# Altium PCB PONG_3.PcbDoc
Units mm, origin at the board's own origin, x right, y up, seen from the top; angles counter-clockwise.
Board outline 310 x 220 mm, 2 copper layers (Top Layer, Bottom Layer); 105 components, 225 nets, 1000 pads, 0 vias.
Unrouted connection lines stored in the file: 557.
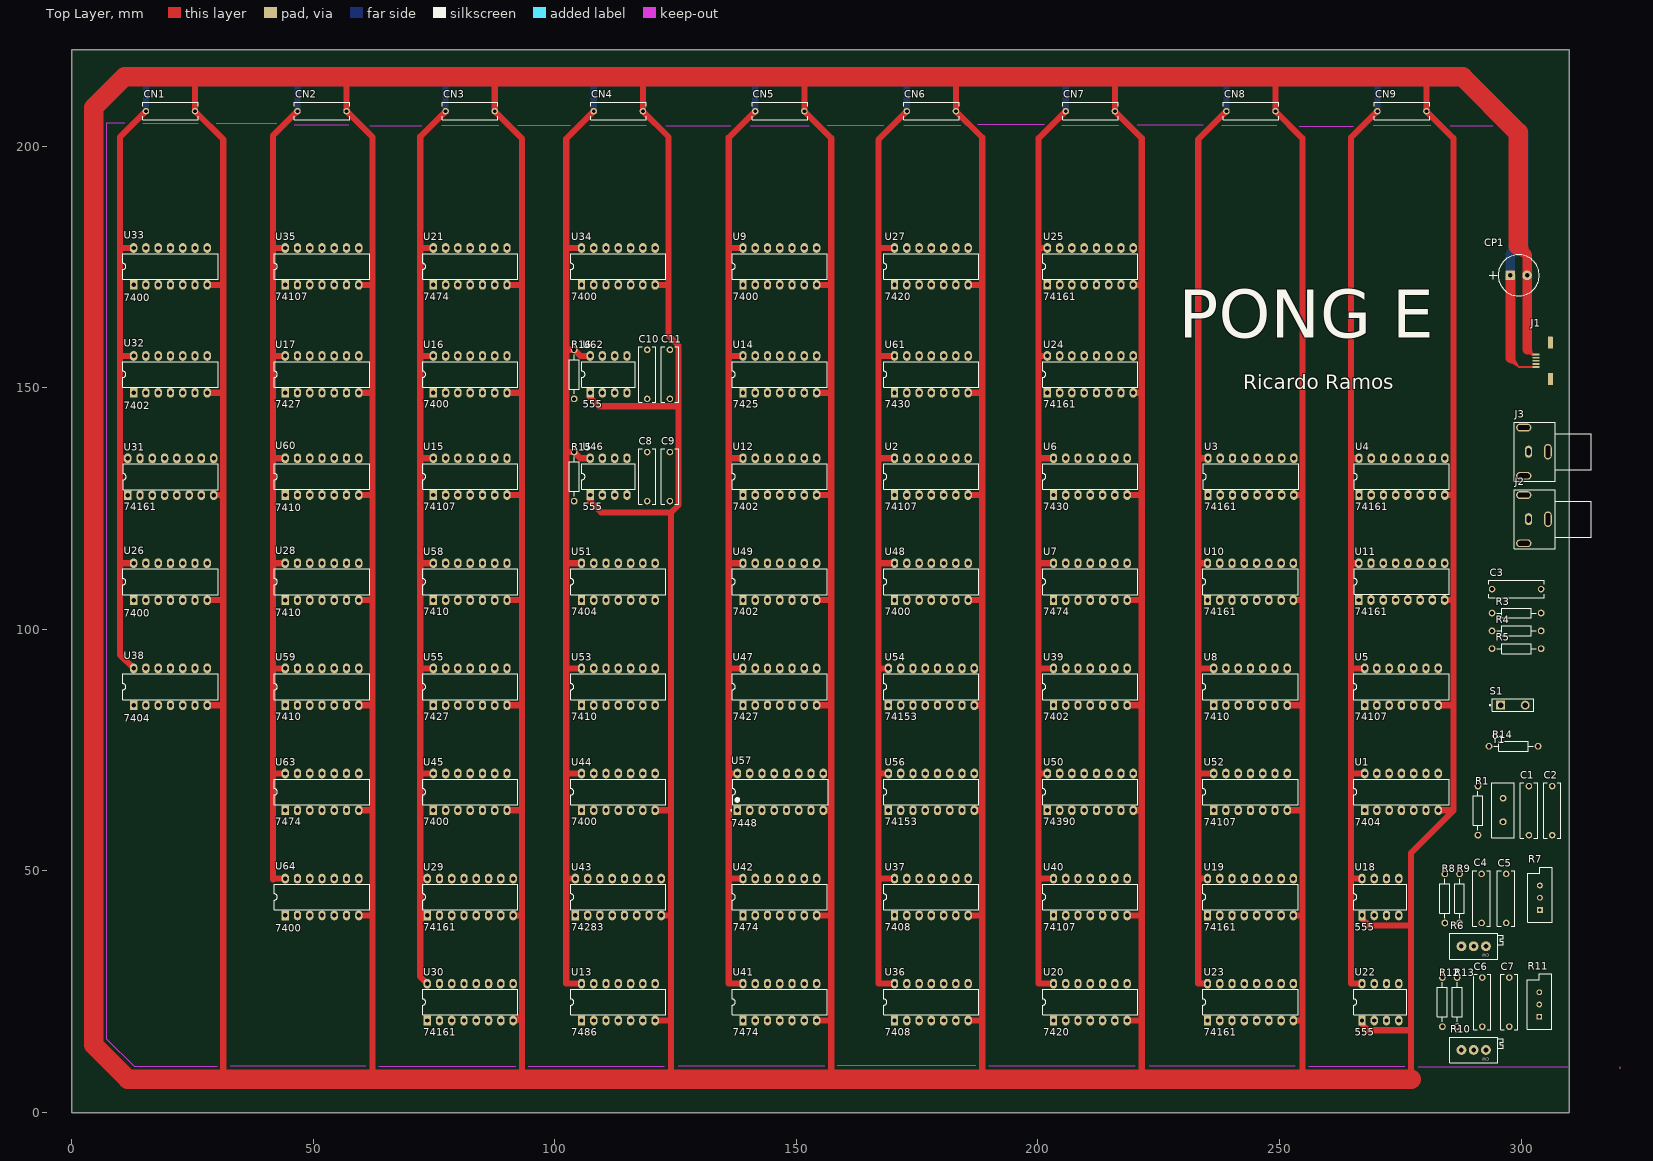
[diagram p0: Top Layer view]
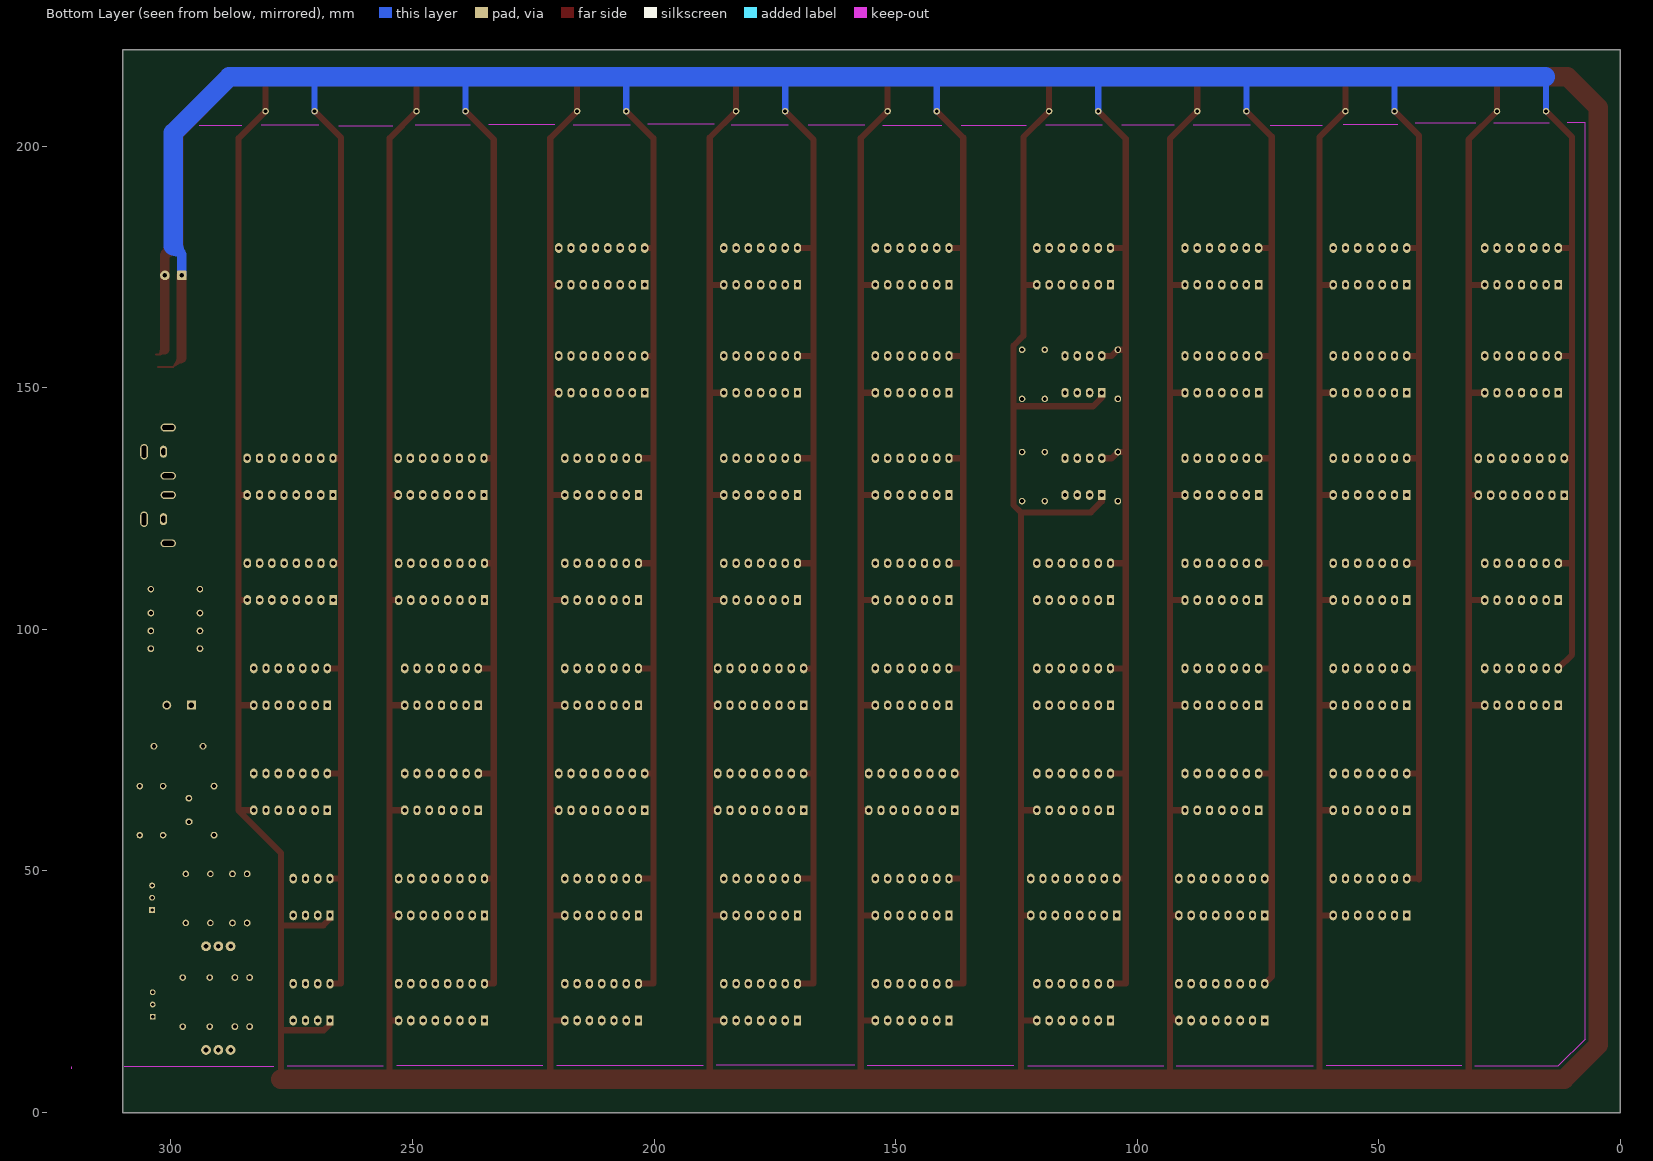
[diagram p1: Bottom Layer view, seen from below]

## Layer stack, top to bottom
Top Solder: solder mask 0.0102, Solder Resist, Dk 3.5
Top Layer: signal copper 0.0356
Dielectric 1: dielectric 0.32, FR-4, Dk 4.8
Bottom Layer: signal copper 0.0356
Bottom Solder: solder mask 0.0102, Solder Resist, Dk 3.5

## Board outline
0,0 310,0 310,220 0,220

## Design rules (kind name [scope] priority, off if disabled: settings)
Clearance [All] p1: gap=0.18 except(0.23: Track-THPad; 0.5: Track-Track)
PolygonConnect [All] p1: connectstyle=Relief reliefconductorwidth=0.254 reliefentries=4 polygonreliefangle="90 Angle" airgapwidth=0.254
RoutingVias [All] p1: holewidth=0.5 width=1 viastyle="Through Hole" minholewidth=0.5 minwidth=1 maxholewidth=0.5 maxwidth=1
SolderMaskExpansion [All] p1: expansion=0.102
Width Width_Power [InNet('VCC') or InNet('GND')] p1: maxlimit=4 minlimit=0.4 preferedwidth=0.4
Width [All] p2: maxlimit=0.4 minlimit=0.4 preferedwidth=0.4
30 further rules are at their usual default settings.

## Classes and differential pairs
component class CLK: C1 C2 R1 U1 U2 Y1
component class GameControl: C8 C9 R14 R15 S1 U44 U45 U46 U47 U48
component class HorizBallControl: U31 U32 U33 U34 U35
component class HorizBallCounter: U24 U25 U26 U27 U28
component class HSYNC: U3 U4 U5 U6 U7 U8 U9
component class Net: U15 U16 U17
component class Paddle_1: C4 C5 R6 R7 R8 R9 U18 U19 U20
component class Paddle_2: C6 C7 R10 R11 R12 R13 U21 U22 U23
component class POWER: CN1 CN2 CN3 CN4 CN5 CN6 CN7 CN8 CN9 CP1 J1
component class ScoreCount: U49 U50 U51 U52 U53
component class ScoreDisplay_1: U54 U55 U56 U57
component class ScoreDisplay_2: U58 U59 U60 U61
component class Sound: C10 C11 J3 R16 U62 U63 U64
component class SYNC-VideoSum: C3 J2 R3 R4 R5 U13 U14
component class VertBallControl: U36 U37 U38 U39 U40 U41 U42 U43
component class VertBallCounter: U29 U30
component class VSYNC: U10 U11 U12

## Components (designator, comment, footprint, x,y, rotation, side; value= is the part's Value field where it differs from the comment)
C1 "Cap" CAPR10.16-11.5x3.6 301.624,62.489 r270 top
C2 "Cap" CAPR10.16-11.5x3.6 306.45,62.489 r270 top
C3 "Cap" CAPR10.16-11.5x3.6 299.084,108.336 r180 top
C4 "Cap" CAPR10.16-11.5x3.6 291.845,44.328 r90 top
C5 "Cap" CAPR10.16-11.5x3.6 296.925,44.328 r90 top
C6 "Cap" CAPR10.16-11.5x3.6 291.972,22.865 r90 top
C7 "Cap" CAPR10.16-11.5x3.6 297.56,22.865 r270 top
C8 "Cap" CAPR10.16-11.5x3.6 119.125,131.631 r90 top
C9 "Cap" CAPR10.16-11.5x3.6 123.824,131.631 r90 top
C10 "Cap" CAPR10.16-11.5x3.6 119.125,152.807 r90 top
C11 "Cap" CAPR10.16-11.5x3.6 123.824,152.807 r90 top
CN1 "Cap" CAPR10.16-11.5x3.6 20.446,207.269 r180 top
CN2 "Cap" CAPR10.16-11.5x3.6 51.815,207.269 r180 top
CN3 "Cap" CAPR10.16-11.5x3.6 82.481,207.269 r180 top
CN4 "Cap" CAPR10.16-11.5x3.6 113.147,207.269 r180 top
CN5 "Cap" CAPR10.16-11.5x3.6 146.568,207.269 r180 top
CN6 "Cap" CAPR10.16-11.5x3.6 177.942,207.269 r180 top
CN7 "Cap" CAPR10.16-11.5x3.6 210.84,207.269 r180 top
CN8 "Cap" CAPR10.16-11.5x3.6 244.093,207.269 r180 top
CN9 "Cap" CAPR10.16-11.5x3.6 275.335,207.269 r180 top
CP1 "Cap" CAPE3.5mm 299.5,173.3 r0 top
J1 "USB Micro Type B (recommended if hand soldering)" "USB Micro B SMD" 308.7,155.6 r90 top
J2 "Video OUT" "RCA 2" 305.561,122.821 r180 top
J3 "Audio OUT" "RCA 2" 305.561,136.784 r180 top
R1 "Res1" AXIAL-0.4 291.083,62.489 r270 top
R3 "Res1" AXIAL-0.4 299.084,103.383 r0 top
R4 "Res1" AXIAL-0.4 299.084,99.7 r0 top
R5 "Res1" AXIAL-0.4 299.084,96.017 r0 top
R6 "RPot" TRIMPOT_THT_PV36X 290.194,34.422 r180 top
R7 "RPot" VR5 303.91,44.455 r90 top
R8 "Res1" AXIAL-0.4 284.225,44.328 r270 top
R9 "Res1" AXIAL-0.4 287.273,44.328 r270 top
R10 "RPot" TRIMPOT_THT_PV36X 290.194,12.959 r180 top
R11 "RPot" VR5 303.783,22.357 r90 top
R12 "Res1" AXIAL-0.4 283.717,22.865 r270 top
R13 "Res1" AXIAL-0.4 286.765,22.865 r270 top
R14 "Res1" AXIAL-0.4 298.449,75.824 r180 top
R15 "Res1" AXIAL-0.4 104.012,131.631 r90 top
R16 "Res1" AXIAL-0.4 104.012,152.807 r90 top
S1 "COIN SW" SPST-2 298.322,84.333 r0 top
U1 "7404" N014 275.24,66.372 r0 top
U2 "74107" N014D 177.942,131.631 r0 top
U3 "74161" N016 244.093,131.631 r0 top
U4 "74161" N016 275.335,131.631 r0 top
U5 "74107" N014 275.24,88.125 r0 top
U6 "7430" N014 210.84,131.631 r0 top
U7 "7474" N014D 210.84,109.878 r0 top
U8 "7410" N014 243.993,88.125 r0 top
U9 "7400" N014 146.568,175.138 r0 top
U10 "74161" N016 243.993,109.878 r0 top
U11 "74161" N016 275.3,109.9 r0 top
U12 "7402" N014 146.568,131.631 r0 top
U13 "7486" N014 113.147,22.865 r0 top
U14 "7425" N014 146.568,152.807 r0 top
U15 "74107" N014 82.481,131.631 r0 top
U16 "7400" N014 82.481,152.807 r0 top
U17 "7427" N014 51.815,152.807 r0 top
U18 "555" P008 270.89,44.618 r0 top
U19 "74161" N016 243.993,44.618 r0 top
U20 "7420" N014 210.84,22.865 r0 top
U21 "7474" N014D 82.481,175.138 r0 top
U22 "555" P008 270.89,22.865 r0 top
U23 "74161" N016 243.993,22.865 r0 top
U24 "74161" N016 210.84,152.807 r0 top
U25 "74161" N016 210.84,175.138 r0 top
U26 "7400" N014 20.446,109.878 r0 top
U27 "7420" N014 177.942,175.138 r0 top
U28 "7410" N014 51.815,109.878 r0 top
U29 "74161" N016 82.481,44.618 r0 top
U30 "74161" N016 82.481,22.865 r0 top
U31 "74161" N016 20.5,131.6 r0 top
U32 "7402" N014 20.446,152.807 r0 top
U33 "7400" N014 20.446,175.138 r0 top
U34 "7400" N014 113.147,175.138 r0 top
U35 "74107" N014 51.815,175.138 r0 top
U36 "7408" N014 177.942,22.865 r0 top
U37 "7408" N014 177.942,44.618 r0 top
U38 "7404" N014 20.446,88.125 r0 top
U39 "7402" N014 210.84,88.125 r0 top
U40 "74107" N014 210.84,44.618 r0 top
U41 "7474" N014D 146.568,22.865 r0 top
U42 "7474" N014D 146.568,44.618 r0 top
U43 "74283" N016D#1 113.147,44.618 r0 top
U44 "7400" N014 113.147,66.372 r0 top
U45 "7400" N014 82.481,66.372 r0 top
U46 "555" P008 111.124,131.631 r0 top
U47 "7427" N014 146.568,88.125 r0 top
U48 "7400" N014 177.942,109.878 r0 top
U49 "7402" N014 146.568,109.878 r0 top
U50 "74390" N016 210.84,66.372 r0 top
U51 "7404" N014 113.147,109.878 r0 top
U52 "74107" N014 243.993,66.372 r0 top
U53 "7410" N014 113.147,88.125 r0 top
U54 "74153" N016 177.942,88.125 r0 top
U55 "7427" N014 82.481,88.125 r0 top
U56 "74153" N016 177.942,66.372 r0 top
U57 "7448" N016D#2 146.684,66.372 r90 top
U58 "7410" N014 82.481,109.878 r0 top
U59 "7410" N014 51.815,88.125 r0 top
U60 "7410" N014 51.815,131.631 r0 top
U61 "7430" N014 177.942,152.807 r0 top
U62 "555" P008 111.124,152.807 r0 top
U63 "7474" N014D 51.815,66.372 r0 top
U64 "7400" N014 51.815,44.618 r0 top
Y1 "14.318 Mhz" HC-49U 296.29,62.616 r90 top

## Footprints (in the part's own frame and the unit in brackets; to place one, negate y for a bottom-side part, rotate by r counter-clockwise, add the part's x,y. Pads: shape width x height; smd on the part's side, far side on the other; paste and mask are expansions set on the pad)
AXIAL-0.4 [mm] "Axial Device, Thru-Hole; 2 Leads; 0.4 in Pin Spacing"
  round 1.4 hole 0.85: 1(-5.08,0) 2(5.08,0)
  silkscreen extent -4.06,-1.02 4.06,1.02
CAPE3.5mm [mm]
  round 0.508 on Mech15: 0(0,0)
  rrect25% 2x2 hole 0.9: 1(-1.75,0)
  round 2 hole 0.9: 2(1.75,0)
  silkscreen extent -6.05,-4.25 4.25,4.25, body extent -4.25,-4.25 4.22,4.23, height 7.1
CAPR10.16-11.5x3.6 [mm] "Capacitor, Ceramic, Thru-Hole, Dipped Radial; Body 11.5 x 3.6 mm (WxT) Pin Spacing 10.16 mm (typ)"
  round 1.35 hole 0.8: 1(-5.08,0) 2(5.08,0)
  silkscreen extent -5.75,-1.8 5.75,1.8
HC-49U [mm] "Quartz Crystal, Thru-Hole; 2 Leads; Body 11.35 x 4.65 x 13.46 mm (LxWxH max)"
  oct 1.4x1.4 hole 0.8: 1(-2.44,0)
  round 1.4 hole 0.8: 2(2.44,0)
  silkscreen extent -5.7,-2.35 5.7,2.35
N014 [mil] "DIP; 14 Leads; Row Spacing 7.62 mm; Pitch 2.54 mm"
  rect 60x80 hole 35.43: 1(-300,-150)
  oval 60x80 hole 35.43: 2(-200,-150) 3(-100,-150) 4(0,-150) 5(100,-150) 6(200,-150) 7(300,-150) 8(300,150) 9(200,150) 10(100,150) 11(0,150) 12(-100,150) 13(-200,150) 14(-300,150)
  silkscreen extent -388,-104 388,104
N014D [mil] "DIP; 14 Leads; Row Spacing 7.62 mm; Pitch 2.54 mm"
  rect 60x80 hole 35.43: 1(-300,-150)
  oval 60x80 hole 35.43: 2(-200,-150) 3(-100,-150) 4(0,-150) 5(100,-150) 6(200,-150) 7(300,-150) 8(300,150) 9(200,150) 10(100,150) 11(0,150) 12(-100,150) 13(-200,150) 14(-300,150)
  silkscreen extent -388,-104 388,104
N016 [mil] "DIP; 16 Leads; Row Spacing 7.62 mm; Pitch 2.54 mm"
  rect 60x80 hole 35.43: 1(-350,-150)
  oval 60x80 hole 35.43: 2(-250,-150) 3(-150,-150) 4(-50,-150) 5(50,-150) 6(150,-150) 7(250,-150) 8(350,-150) 9(350,150) 10(250,150) 11(150,150) 12(50,150) 13(-50,150) 14(-150,150) 15(-250,150) 16(-350,150)
  silkscreen extent -388,-104 388,104
N016D#1 [mil] "DIP; 16 Leads; Row Spacing 7.62 mm; Pitch 2.54 mm"
  rect 60x80 hole 35.43: 1(-350,-150)
  oval 60x80 hole 35.43: 2(-250,-150) 3(-150,-150) 4(-50,-150) 5(50,-150) 6(150,-150) 7(250,-150) 8(350,-150) 9(350,150) 10(250,150) 11(150,150) 12(50,150) 13(-50,150) 14(-150,150) 15(-250,150) 16(-350,150)
  silkscreen extent -388,-104 388,104
N016D#2 [mil] "DIP, 16-Leads, Row Spacing 7.62mm, Pitch 2.54mm, Body 19.31x6.35mm"
  rect 80x60 hole 35.43: 1(-150,350)
  oval 80x60 hole 35.43: 2(-150,250) 3(-150,150) 4(-150,50) 5(-150,-50) 6(-150,-150) 7(-150,-250) 8(-150,-350) 9(150,-350) 10(150,-250) 11(150,-150) 12(150,-50) 13(150,50) 14(150,150) 15(150,250) 16(150,350)
  silkscreen extent -155,-390 104,406, body extent -130,-390 130,390, height 200
P008 [mil] "DIP; 8 Leads; Row Spacing 7.62 mm; Pitch 2.54 mm"
  rect 60x80 hole 35.43: 1(-150,-150)
  oval 60x80 hole 35.43: 2(-50,-150) 3(50,-150) 4(150,-150) 5(150,150) 6(50,150) 7(-50,150) 8(-150,150)
  silkscreen extent -217,-104 217,104
"RCA 2" [mm] "3.5mm Audio Jack, 3 pin"
  oval 1.6x3.2 hole 1 slot 2.5 at 90 deg: 1(0,0)
  oval 3.2x1.6 hole 1 slot 2.5 at 0 deg: 1(5,5) 1(5,-5)
  oval 1.5x2.5 hole 0.8 slot 1.4 at 90 deg: 2(4,0)
  silkscreen extent -9,-6.13 7,6.12
SPST-2 [mm] "Switch; 2 Leads"
  rect 1.85x1.85 hole 1.1: 1(-2.54,0)
  round 1.85 hole 1.1: 2(2.54,0)
  silkscreen extent -4.89,-1.27 4.28,1.27
TRIMPOT_THT_PV36X [mil] "TRIMMER, MURATA, PV36X"
  round 80 hole 38: CCW(100,0) CW(-100,0) W(0,0)
  silkscreen extent -240,-104 195,104, body extent -240,-98 189,98, height 394
"USB Micro B SMD" [mm]
  rrect20% 0.35x1.5 smd: 1(-1.3,5.6) 2(-0.65,5.6) 3(0,5.6) 4(0.65,5.6) 5(1.3,5.6)
  rrect20% 2.5x1 smd: SH(-3.75,2.625) SH(3.75,2.625)
VR5 [mm] "Thru-Hole; 3 Leads"
  rect 1.2x1.2 hole 0.7: 1(-2.54,0)
  round 1.2 hole 0.7: 2(0,0) 3(2.54,0)
  silkscreen extent -5.08,-2.54 6.35,2.54

## Part data
C1 C2 C3 C4 C5 C6 C7 C8 C9 C10 C11 CN1 CN2 CN3 CN4 CN5 CN6 CN7 CN8 CN9 CP1: "Capacitor"
J1: library part USB_Micro_TypeB_FCI, "Connector SMD-THD USB Micro Type B middle mount"
J2 J3: library part "Phonejack2 TN", "Jack Socket, 1/4\" [6.5mm], Thru-Hole, Vertical, 2-Conductor with Tip closed"
R1 R3 R4 R5 R8 R9 R12 R13 R14 R15 R16: "Resistor"
R6 R7 R10 R11: "Potentiometer"
S1: library part SW-PB, "Switch"
U1 U38 U51: library part SN74LS04N, "Hex Inverter"
U2: library part SN74HC107N, "Dual J-K Negative-Edge-Triggered Flip-Flop with Clear"
U3 U4 U10 U11 U19 U23 U24 U25 U29 U30 U31: library part SN74LS161AN, "Synchronous 4-Bit Counter"
U5 U15 U35 U40 U52: library part SN74LS107AN, "Dual J-K Flip-Flop with Clear"
U6 U61: library part SN74LS30N, "8-Input Positive-NAND Gate"
U7 U21 U41 U42 U63: library part SN74LS74AN, "Dual D-Type Positive-Edge-Triggered Flip-Flop with Preset and Clear"
U8 U28 U53 U58 U59 U60: library part SN74LS10N, "Triple 3-Input Positive-NAND Gate"
U9 U16 U26 U33 U34 U44 U45 U48 U64: library part SN74LS00N, "Quadruple 2-Input Positive-NAND Gate"
U12 U32 U39 U49: library part SN74LS02N, "Quadruple 2-Input Positive-NOR Gate"
U13: library part SN74LS86AN, "Quadruple 2-Input Exclusive-OR Gate"
U14: library part SN7425N, "Dual 4-Input NOR Gate with Strobe"
U17 U47 U55: library part SN74LS27N, "Triple 3-Input Positive-NOR Gate"
U18 U22 U46 U62: library part NE555P, "Precision Timer"
U20 U27: library part SN74LS20N, "Dual 4-Input Positive-NAND Gate"
U36 U37: library part SN74LS08N, "Quadruple 2-Input Positive-AND Gate"
U43: library part SN54S283FK, "4-Bit Binary Full Adder with Fast Carry"
U50: library part SN74LS390N, "Dual 4-Bit Decade and Binary Counter"
U54 U56: library part SN74LS153N, "Dual 4-Line to 1-Line Data Selector/Multiplexer"
U57: library part SN74LS48N, "BCD-to-Seven-Segment Decoder/Driver"
Y1: library part XTAL, "Crystal Oscillator"

## Nets (pads, with @x,y where several pads share a name; then routed paths per layer and width w, separated by ;. In a path a pad name is that pad's centre, name@x,y a point inside that pad or via, vN(x,y) a via of type N, cw(c..) or ccw(c..) an arc to the next point about the centre after c; other vN are vias at no path point)
1H: U3.14 U15.12
1V: U8.3 U10.14
2H: U3.13 U6.4
2V: U10.13
4H: U3.12 U6.5 U21.3 U48.12 U53.10 U55.3 U55.9
4V: U8.5 U8.11 U10.12 U17.13
7S_A: U57.13 U59.3
7S_B: U57.12 U58.9
7S_C: U57.11 U59.1
7S_D: U57.10 U60.13
7S_E: U57.9 U58.4
7S_F: U57.15 U58.1
7S_G: U57.14 U59.9
8H: U3.11 U48.13 U53.9 U55.5 U55.11
8V: U9.12 U9.13 U10.11
16H: U4.14 U8.2 U9.10 U51.3 U53.11
16V: U11.14 U12.6 U51.5 U58.5 U59.13 U60.2
32H: U4.13 U54.14 U56.14
32V: U11.13 U49.8 U49.9 U64.2
64H: U4.12 U6.6 U8.1 U8.13 U47.10 U53.4 U54.2 U56.2
64V: U11.12 U14.12
128H: U4.11 U6.11 U16.10 U21.2 U47.3 U47.4 U47.5
128V: U11.11 U14.10
256H: U5.3 U6.2 U15.1 U16.1 U17.4 U36.4 U36.12 U37.4 U47.11 U53.3
256V: U5.5 U8.4
\256H: U5.2 U15.4 U17.11 U32.6 U36.2 U36.10 U37.2
\256V: U5.6 U18.2 U22.2
\ATTRACT: U21.4 U26.2 U38.13 U39.4
\CLR: U15.10 U24.1 U25.1 U26.3
\HBLANK: U9.3 U9.4 U24.10
\HIT: U48.3 U63.1
\HIT1: U21.13 U45.8 U45.12
\HIT2: U21.10 U45.6 U45.13
\HRESET: U3.1 U4.1 U5.13 U7.5 U9.5
\HSYNC: U9.8 U13.1 U19.2 U23.2 U29.2 U30.2
\HVID: U12.8 U27.6 U27.9 U27.10 U27.12 U27.13 U39.9
\MISS: U44.1 U48.6 U51.1 U62.2
\RUN: U39.6 U44.12 U45.3 U47.2
\SCORE1_10: U40.6 U54.6 U54.10 U56.10
\SCORE2_10: U52.2 U54.4 U54.12 U56.12
\SERVE: U42.9 U52.10
\SRST: R14.1 S1.2 U38.9 U40.10 U44.2 U44.13 U52.13
\STOPG1: U28.8 U44.5
\STOPG2: U44.4 U53.12
\VBLANK: U12.1 U12.5 U29.10
\VPAD1: U16.6 U17.3
\VPAD2: U16.11 U17.9
\VRESET: U5.10 U7.9 U10.1 U11.1
\VSYNC: U8.8 U13.2
\VVID: U12.9 U12.11 U12.12 U28.6 U39.8 U52.11
A: U56.7 U57.7
A6: U29.3 U43.4
AA: U24.3 U34.8
ATTRACT: U26.10 U38.3 U38.12 U48.9 U64.13
B: U56.9 U57.1
B1: U19.13 U20.2 U36.1
B2: U20.9 U23.13 U36.5
B6: U29.4 U43.1
BALL: U12.10 U14.1
BB: U24.4 U34.6 U34.9
C: U54.7 U57.2
C1: U19.12 U20.1 U36.9
C2: U20.12 U23.12 U36.13
C5-EN: U14.8 U57.4
C6: U29.5 U43.13
CLK: U2.3 U3.2 U4.2 U7.3 U7.11 U24.2 U25.2
D: U54.9 U57.6
D1: U19.11 U20.4 U37.1
D2: U20.13 U23.11 U37.5
D6: U29.6 U43.10
GND: C1.1 C2.1 C4.1 C5.1 C6.1 C7.1 C8.1 C9.1 C10.1 C11.1 CN1.1 CN2.1 CN3.1 CN4.1 CN5.1 CN6.1 CN7.1 CN8.1 CN9.1 CP1.2 J1.5 J2.1 J3.1 R7.1 R11.1 S1.1 U1.7 U2.7 U3.8 U4.8 U5.7 U6.7 U7.7 U8.7 U9.7 U10.8 U11.8 U12.7 U13.7 U14.7 U15.7 U16.7 U17.7 U18.1 U19.8 U20.7 U21.7 U22.1 U23.8 U24.5 U24.8 U25.3 U25.4 U25.5 U25.8 U26.7 U27.7 U28.7 U29.8 U30.3 U30.4 U30.5 U30.6 U30.8 U31.8 U32.7 U33.7 U34.7 U35.7 U35.11 U36.7 U37.7 U38.7 U39.7 U40.7 U41.7 U42.7 U43.7 U43.8 U43.11 U43.12 U44.7 U45.7 U46.1 U47.7 U48.7 U49.7 U50.8 U51.7 U52.7 U53.7 U54.1 U54.8 U54.15 U55.7 U56.1 U56.8 U56.15 U57.8 U58.7 U59.7 U60.7 U61.7 U62.1 U63.7 U64.7 | length 2935.5
  Top Layer w0.4: 301.25,157.95 302.3,156.9 J1.5
  Top Layer w1.27: 25.526,214.381 CN1.1 31.368,201.427 31.368,171.328 ; U38.7 31.35,84.315 ; U26.7 31.368,106.068 ; U32.7 31.368,148.997 ; U33.7 31.368,171.328 ; 31.368,6.926 31.368,106.068 ; 56.895,214.381 CN2.1 62.229,201.935 62.229,171.328 ; U64.7 62.229,40.808 ; U63.7 62.229,62.562 ; U59.7 62.229,84.315 ; U28.7 62.229,106.068 ; U60.7 62.229,127.821 ; U17.7 62.208,148.997 ; U35.7 62.229,171.328 ; 62.229,6.926 62.229,40.808 ; 62.265,40.808 62.229,40.808 ; 87.561,214.381 CN3.1 93.217,201.613 93.217,171.328 ; U45.7 93.217,62.562 ; U55.7 93.217,84.315 ; U58.7 93.217,106.068 ; U15.7 93.217,127.821 ; U16.7 93.217,148.997 ; U21.7 93.217,171.328 ; U30.8 92.074,19.055 93.217,20.198 ; U29.8 93.217,40.808 ; 93.217,6.926 93.217,20.198 ; U46.1 107.314,126.486 109.589,124.211 124.078,124.211 ; U62.1 107.314,147.986 109.118,146.182 125.602,146.182 ; 118.227,214.381 CN4.1 123.57,201.926 123.57,171.328 ; U13.7 124.078,19.055 ; U44.7 124.078,62.562 ; U34.7 123.57,171.328 ; U43.8 124.078,40.808 ; 124.078,6.926 124.078,19.055 ; 151.648,214.381 CN5.1 157.225,201.692 157.225,171.328 ; U41.7 157.225,19.055 ; U42.7 157.225,40.808 ; U47.7 157.225,84.315 ; U49.7 157.225,106.068 ; U12.7 157.225,127.821 ; U14.7 157.225,148.997 ; U9.7 157.225,171.328 ; U57.8 157.225,62.562 ; 156.717,6.926 157.225,7.434 157.225,19.055 ; 183.022,214.381 CN6.1 188.467,201.824 188.467,171.328 ; U36.7 188.467,19.055 ; U37.7 188.467,40.808 ; U48.7 188.467,106.068 ; U2.7 188.467,127.821 ; U61.7 188.467,148.997 ; U27.7 188.467,171.328 ; U56.8 188.467,62.562 ; U54.8 188.467,84.315 ; 188.467,6.926 188.467,19.055 ; 215.92,214.381 CN7.1 221.487,201.702 221.487,171.328 ; U20.7 221.487,19.055 ; U40.7 221.487,40.808 ; U39.7 221.487,84.315 ; U7.7 221.487,106.068 ; U6.7 221.487,127.821 ; U50.8 221.487,62.562 ; U24.8 221.487,148.997 ; U25.8 221.487,171.328 ; 221.487,6.926 221.487,19.055 ; 249.173,214.381 CN8.1 254.761,201.681 254.761,127.821 ; U52.7 254.761,62.562 ; U8.7 254.761,84.315 ; U23.8 254.761,19.055 ; U19.8 254.761,40.808 ; U10.8 254.761,106.068 ; U3.8 254.761,127.821 ; 254.761,6.926 254.761,19.055 ; U22.1 267.08,18.32 268.377,17.023 277.24,17.023 ; U18.1 267.08,40.12 268.46,38.74 277.24,38.74 ; 277.24,6.926 277.24,17.023 ; 280.415,214.381 CN9.1 286.003,201.681 286.003,127.821 ; U1.7 285.93,62.562 ; U5.7 286.003,84.315 ; U4.8 286.003,127.821 ; 31.368,106.068 31.368,127.821 ; 31.368,127.821 29.336,127.821 31.368,127.821 ; 31.368,127.821 31.368,148.997 ; 31.368,148.997 31.368,171.328 ; 62.229,40.808 62.229,62.562 ; 62.229,62.562 62.229,84.315 ; 62.229,84.315 62.229,106.068 ; 62.229,106.068 62.229,127.821 ; 62.229,127.821 62.229,171.328 ; 93.217,20.198 93.217,40.808 ; 93.217,40.808 93.217,62.562 ; 93.217,62.562 93.217,84.315 ; 93.217,84.315 93.217,106.068 ; 93.217,106.068 93.217,127.821 ; 93.217,127.821 93.217,148.997 ; 93.217,148.997 93.217,171.328 ; 123.57,171.328 123.57,160.787 125.602,158.755 125.602,146.182 ; 124.078,19.055 124.078,40.808 ; 124.078,40.808 124.078,62.562 ; 124.078,62.562 124.078,124.211 ; 124.078,124.211 125.602,125.735 125.602,146.182 ; 157.225,19.055 157.225,40.808 ; 157.225,40.808 157.225,62.562 ; 157.225,62.562 157.225,84.315 ; 157.225,84.315 157.225,106.068 ; 157.225,106.068 157.225,127.821 ; 157.225,127.821 157.225,148.997 ; 157.225,148.997 157.225,171.328 ; 188.467,19.055 188.467,40.808 ; 188.467,40.808 188.467,62.562 ; 188.467,62.562 188.467,84.315 ; 188.467,84.315 188.467,106.068 ; 188.467,106.068 188.467,127.821 ; 188.467,127.821 188.467,148.997 ; 188.467,148.997 188.467,171.328 ; 221.487,19.055 221.487,40.808 ; 221.487,40.808 221.487,62.562 ; 221.487,62.562 221.487,84.315 ; 221.487,84.315 221.487,106.068 ; 221.487,106.068 221.487,127.821 ; 221.487,127.821 221.487,148.997 ; 221.487,148.997 221.487,171.328 ; 254.761,19.055 254.761,40.808 ; 254.761,40.808 254.761,62.562 ; 254.761,62.562 254.761,84.315 ; 254.761,84.315 254.761,106.068 ; 254.761,106.068 254.761,127.821 ; 277.24,17.023 277.24,38.74 ; 277.24,38.74 277.24,53.726 286.003,62.489 286.003,84.315 ; 286.003,84.315 286.003,106.068 ; 286.003,106.068 284.13,106.068 286.003,106.068 ; 286.003,106.068 286.003,127.821
  Top Layer w2: 299.4,179.4 301.25,177.55 CP1.2 301.25,157.95
  Top Layer w4: 277.24,6.926 254.761,6.926 221.487,6.926 188.467,6.926 156.717,6.926 124.078,6.926 93.217,6.926 62.229,6.926 31.368,6.926 11.619,6.926 4.571,13.975 4.571,208.031 10.921,214.381 25.526,214.381 56.895,214.381 87.561,214.381 118.227,214.381 151.648,214.381 183.022,214.381 215.92,214.381 249.173,214.381 280.415,214.381 287.908,214.381 299.4,202.889 299.4,179.4
HBLANK: U9.2 U9.6 U9.9 U48.4
HIT: U38.1 U41.3 U41.11 U41.13 U42.1 U42.3 U45.11 U48.1 U48.2
"HIT SOUND": U31.2 U60.3 U64.8
"HIT SOUND EN": U63.6 U64.9
HRESET: U7.6 U10.2 U11.2
L: U21.9 U34.1 U39.11
MISSED: U39.12 U48.8 U49.3
MOVE: U34.2 U34.4 U34.11 U35.4
NET: U14.2 U17.12
NetC1_2: C1.2 R1.2 U1.1 Y1.1
NetC2_2: C2.2 R1.1 U1.2 U2.12 Y1.2
NetC3_1: C3.1 R3.2 R4.2 R5.2
NetC3_2: C3.2 J2.2
NetC4_2: C4.2 R8.1 U18.6 U18.7
NetC5_2: C5.2 R7.3 R9.2
NetC6_2: C6.2 R12.1 U22.6 U22.7
NetC7_2: C7.2 R11.3 R13.2
NetC8_2: C8.2 U46.5
NetC9_2: C9.2 R15.1 U46.6 U46.7
NetC10_2: C10.2 U62.5
NetC11_2: C11.2 R16.1 U62.6 U62.7
NetJ3_2: J3.2 U64.11
NetR6_CCW: R6.CCW R6.W R8.2
NetR9_1: R9.1 U18.5
NetR10_CCW: R10.CCW R10.W R12.2
NetR13_1: R13.1 U22.5
NetU1_3: U1.3 U13.3
NetU1_5: U1.5 U14.6
NetU1_8: U1.8 U16.4
NetU1_9: U1.9 U18.3 U19.1
NetU1_10: U1.10 U16.13
NetU1_11: U1.11 U22.3 U23.1
NetU1_12: U1.12 U21.11
NetU1_13: U1.13 U26.8
NetU3_15: U3.15 U4.10
NetU4_15: U4.15 U5.12
NetU5_9: U5.9 U11.15
NetU6_8: U6.8 U7.2
NetU7_12: U7.12 U8.6
NetU8_10: U8.10 U9.11
NetU8_12: U8.12 U9.1
NetU10_15: U10.15 U11.10
NetU13_4: U13.4 U41.5
NetU13_5: U13.5 U13.10 U13.13 U40.3
NetU13_6: U13.6 U43.5
NetU13_8: U13.8 U43.3
NetU13_9: U13.9 U41.9
NetU13_11: U13.11 U38.5 U43.14
NetU13_12: U13.12 U42.5
NetU14_9: U14.9 U49.4
NetU14_13: U14.13 U49.10
NetU15_2: U15.2 U16.2
NetU15_5: U15.5 U27.1 U28.13
NetU15_9: U15.9 U25.15 U27.2 U28.2
NetU16_3: U16.3 U17.2
NetU16_5: U16.5 U19.10 U20.6
NetU16_8: U16.8 U17.5 U17.10
NetU16_9: U16.9 U21.6
NetU16_12: U16.12 U20.8 U23.10
NetU19_14: U19.14 U20.5
NetU20_10: U20.10 U23.14
NetU24_9: U24.9 U25.9 U28.12
NetU24_11: U24.11 U27.5
NetU24_12: U24.12 U27.4
NetU24_15: U24.15 U25.7 U28.1
NetU26_4: U26.4 U29.15 U30.7
NetU26_6: U26.6 U29.9 U30.9
NetU26_11: U26.11 U31.10 U33.1
NetU26_12: U26.12 U31.12 U32.3
NetU26_13: U26.13 U31.11 U32.2
NetU27_8: U27.8 U48.5
NetU28_4: U28.4 U29.11
NetU28_5: U28.5 U29.12
NetU32_1: U32.1 U33.9 U33.10
NetU32_4: U32.4 U35.9 U35.12
NetU32_8: U32.8 U36.3
NetU32_9: U32.9 U36.6
NetU32_10: U32.10 U41.2
NetU32_11: U32.11 U36.11
NetU32_12: U32.12 U36.8
NetU32_13: U32.13 U41.12
NetU33_2: U33.2 U33.8 U33.13
NetU33_3: U33.3 U33.4
NetU33_6: U33.6 U35.13
NetU33_11: U33.11 U35.10
NetU34_3: U34.3 U34.10
NetU34_12: U34.12 U35.5
NetU34_13: U34.13 U35.3 U35.8
NetU37_3: U37.3 U39.3
NetU37_6: U37.6 U39.2
NetU38_2: U38.2 U40.13
NetU38_4: U38.4 U41.1
NetU38_6: U38.6 U43.6
NetU38_10: U38.10 U45.1
NetU39_1: U39.1 U42.2
NetU39_10: U39.10 U45.5 U45.10
NetU39_13: U39.13 U50.1
NetU42_12: U42.12 U42.13 U47.12
NetU44_8: U44.8 U46.2
NetU46_3: U46.3 U47.13
NetU47_6: U47.6 U47.9 U53.5
NetU47_8: U47.8 U49.6
NetU48_10: U48.10 U51.2
NetU48_11: U48.11 U49.11
NetU49_1: U49.1 U50.15
NetU49_5: U49.5 U55.12
NetU49_12: U49.12 U51.4 U55.4 U55.10
NetU49_13: U49.13 U58.10 U59.2
NetU51_6: U51.6 U58.11 U58.13 U59.5 U59.11
NetU51_8: U51.8 U59.10 U60.1
NetU51_9: U51.9 U53.8
NetU52_5: U52.5 U64.4
NetU53_6: U53.6 U55.1 U55.2 U55.13
NetU55_6: U55.6 U58.2 U58.3
NetU55_8: U55.8 U59.4
NetU58_6: U58.6 U61.2
NetU58_8: U58.8 U61.3
NetU58_12: U58.12 U61.1
NetU59_6: U59.6 U61.6
NetU59_8: U59.8 U61.5
NetU59_12: U59.12 U61.4
NetU60_6: U60.6 U64.12
NetU60_12: U60.12 U61.12
PAD1: U14.4 U17.6 U42.11 U45.9
PAD2: U14.5 U17.8 U45.4
R: U21.8 U21.12 U34.5 U49.2
"RST SPEED": U31.1 U44.3 U44.9 U44.10
RUN: U44.11 U45.2
SC: U26.9 U62.3 U64.1
SCORE: R5.1 U61.8
SCORE1_1: U28.10 U50.3 U50.4 U56.5
SCORE1_2: U50.5 U56.11
SCORE1_4: U28.9 U50.6 U54.5
SCORE1_8: U40.9 U50.7 U54.11
SCORE1_10: U28.11 U40.5
SCORE2_1: U50.12 U50.13 U53.1 U56.3
SCORE2_2: U50.11 U56.13
SCORE2_4: U50.10 U53.2 U54.3
SCORE2_8: U50.9 U52.12 U54.13
SCORE2_10: U52.3 U53.13
SCORESOUND: U60.4 U64.3
SERVE: U26.1 U42.8
SRST: U38.8 U50.2 U50.14
"STOP G": U38.11 U39.5 U44.6 U47.1
SYNC: R4.1 U1.4
TOPBOTHITSOUND: U60.5 U64.6
VBLANK: U8.9 U12.3 U12.4 U17.1 U40.12 U52.9
VCC: CN1.2 CN2.2 CN3.2 CN4.2 CN5.2 CN6.2 CN7.2 CN8.2 CN9.2 CP1.1 J1.1 R6.CW R7.2 R10.CW R11.2 R14.2 R15.2 R16.2 U1.14 U2.1 U2.4 U2.13 U2.14 U3.3 U3.4 U3.5 U3.6 U3.7 U3.9 U3.10 U3.16 U4.3 U4.4 U4.5 U4.6 U4.7 U4.9 U4.16 U5.1 U5.4 U5.8 U5.11 U5.14 U6.1 U6.3 U6.12 U6.14 U7.1 U7.4 U7.10 U7.13 U7.14 U8.14 U9.14 U10.3 U10.4 U10.5 U10.6 U10.7 U10.9 U10.10 U10.16 U11.3 U11.4 U11.5 U11.6 U11.7 U11.9 U11.16 U12.14 U13.14 U14.3 U14.11 U14.14 U15.8 U15.11 U15.13 U15.14 U16.14 U17.14 U18.4 U18.8 U19.3 U19.4 U19.5 U19.6 U19.7 U19.9 U19.16 U20.14 U21.1 U21.14 U22.4 U22.8 U23.3 U23.4 U23.5 U23.6 U23.7 U23.9 U23.16 U24.6 U24.7 U24.16 U25.6 U25.10 U25.16 U26.14 U27.14 U28.14 U29.1 U29.7 U29.16 U30.1 U30.10 U30.16 U31.3 U31.4 U31.5 U31.6 U31.7 U31.9 U31.16 U32.14 U33.14 U34.14 U35.1 U35.14 U36.14 U37.14 U38.14 U39.14 U40.8 U40.11 U40.14 U41.4 U41.10 U41.14 U42.4 U42.10 U42.14 U43.2 U43.15 U43.16 U44.14 U45.14 U46.4 U46.8 U47.14 U48.14 U49.14 U50.16 U51.14 U52.1 U52.4 U52.14 U53.14 U54.16 U55.14 U56.4 U56.6 U56.16 U57.3 U57.5 U57.16 U58.14 U59.14 U60.14 U61.11 U61.14 U62.4 U62.8 U63.2 U63.4 U63.14 U64.14 | length 2153.2
  Top Layer w0.4: 297.8,156.1 299.6,154.3 J1.1@302.7,154.3
  Top Layer w1.27: U31.16@11.556,135.441 9.979,135.441 ; U38.14 9.979,94.782 9.979,113.688 ; U26.14 9.979,113.688 ; U32.14 9.979,156.617 ; U33.14 9.979,178.948 ; CN1.2 9.979,201.882 9.979,178.948 ; 41.782,178.948 U35.14 ; U64.14 41.818,48.428 41.655,48.265 41.655,70.182 ; U63.14 41.655,70.182 ; U59.14 41.655,91.935 ; U28.14 41.655,113.688 ; U60.14 41.655,135.441 ; U17.14 41.655,156.617 ; CN2.2 41.655,202.189 41.655,156.617 ; U30.16 72.135,28.131 72.135,48.428 ; U29.16 72.135,48.428 ; U45.14 72.135,70.182 ; U55.14 72.135,91.935 ; U58.14 72.135,113.688 ; U15.14 72.135,135.441 ; U16.14 72.135,156.617 ; U21.14 72.135,178.948 ; CN3.2 72.135,202.003 72.135,178.948 ; 102.467,157.887 R16.2 ; R16.2@103.906,157.993 R16.2 ; R15.2@103.939,136.784 R15.2 ; U43.16 102.361,48.428 ; U13.14 102.361,26.675 102.361,48.428 ; U44.14 102.361,70.182 ; U53.14 102.361,91.935 ; U51.14 102.361,113.688 ; U34.14 102.361,178.948 ; U46.8 105.282,135.441 R15.2 ; U62.8 105.282,156.617 R16.2 ; CN4.2 102.361,201.563 102.361,178.948 ; 136.07,70.182 U57.16 ; U41.14 136.016,26.675 136.016,48.428 ; U42.14 136.016,48.428 ; U47.14 136.016,91.935 ; U49.14 136.016,113.688 ; U12.14 136.016,135.441 ; U14.14 136.016,156.617 ; U9.14 136.016,178.948 ; CN5.2 136.016,201.797 136.016,178.948 ; U56.16 167.004,70.182 ; U54.16 167.004,91.935 ; U36.14 167.004,26.675 167.004,48.428 ; U37.14 167.004,48.428 ; U48.14 167.004,113.688 ; U2.14 167.004,135.441 ; U61.14 167.004,156.617 ; U27.14 167.004,178.948 ; CN6.2 167.004,201.411 167.004,178.948 ; U50.16 200.151,70.182 ; U24.16 200.151,156.617 ; U25.16 200.151,178.948 ; U20.14 200.151,26.675 200.151,48.428 ; U40.14 200.151,48.428 ; U39.14 200.151,91.935 ; U7.14 200.151,113.688 ; U6.14 200.151,135.441 ; CN7.2 200.151,201.66 200.151,178.948 ; U23.16 233.171,26.675 233.171,48.428 ; U19.16 233.171,48.428 ; U10.16 233.171,113.688 ; U3.16 233.171,135.441 ; U52.14 233.171,70.182 ; U8.14 233.171,91.935 ; CN8.2 233.171,201.427 233.171,135.441 ; U11.16@266.35,113.688 264.773,113.688 ; U4.16 264.773,135.441 ; U22.8 264.794,26.675 264.794,48.428 ; U18.8 264.794,48.428 ; U1.14 264.794,70.182 ; U5.14 264.794,91.935 ; CN9.2 264.773,201.787 264.773,135.441 ; 9.979,113.688 9.979,135.441 ; 9.979,135.441 9.979,156.617 ; 9.979,156.617 9.979,178.948 ; 41.655,70.182 41.655,91.935 ; 41.655,91.935 41.655,113.688 ; 41.655,113.688 41.655,135.441 ; 41.655,135.441 41.655,156.617 ; 72.135,48.428 72.135,70.182 ; 72.135,70.182 72.135,91.935 ; 72.135,91.935 72.135,113.688 ; 72.135,113.688 72.135,135.441 ; 72.135,135.441 72.135,156.617 ; 72.135,156.617 72.135,178.948 ; 102.361,48.428 102.361,70.182 ; 102.361,70.182 102.361,91.935 ; 102.361,91.935 102.361,113.688 ; 102.361,113.688 102.361,136.711 ; 102.361,136.711 R15.2 ; 102.361,136.711 102.361,178.948 ; 136.016,48.428 136.016,91.935 ; 136.016,91.935 136.016,113.688 ; 136.016,113.688 136.016,135.441 ; 136.016,135.441 136.016,156.617 ; 136.016,156.617 136.016,178.948 ; 167.004,48.428 167.004,70.182 ; 167.004,70.182 167.004,91.935 ; 167.004,91.935 167.004,113.688 ; 167.004,113.688 167.004,135.441 ; 167.004,135.441 167.004,156.617 ; 167.004,156.617 167.004,178.948 ; 200.151,48.428 200.151,70.182 ; 200.151,70.182 200.151,91.935 ; 200.151,91.935 200.151,113.688 ; 200.151,113.688 200.151,135.441 ; 200.151,135.441 200.151,156.617 ; 200.151,156.617 200.151,178.948 ; 233.171,48.428 233.171,70.182 ; 233.171,70.182 233.171,91.935 ; 233.171,91.935 233.171,113.688 ; 233.171,113.688 233.171,135.441 ; 264.773,113.688 264.773,135.441 ; 264.773,113.688 264.773,104.715 264.794,104.694 264.794,91.935 ; 264.794,48.428 264.794,70.182 ; 264.794,70.182 264.794,91.935
  Top Layer w2: 297.8,156.1 297.8,173.3 297.8,156.1
  Bottom Layer w1.27: CN1.2 15.366,214.254 15.493,214.381 ; CN2.2 46.735,214.381 ; CN3.2 77.401,214.381 ; CN4.2 108.067,214.381 ; CN5.2 141.488,214.381 ; CN6.2 172.862,214.381 ; CN7.2 205.76,214.381 ; CN8.2 239.013,214.381 ; CN9.2 270.255,214.381
  Bottom Layer w2: CP1.1 297.75,177.65 299.5,179.4
  Bottom Layer w4: 15.493,214.381 46.735,214.381 77.401,214.381 108.067,214.381 141.488,214.381 172.862,214.381 205.76,214.381 239.013,214.381 270.255,214.381 287.908,214.381 299.5,202.789 299.5,179.4
VIDEO: R3.1 U1.6
VPOS16: U30.14 U64.10
VPOS32: U30.13 U64.5
VPOS256: U26.5 U28.3 U30.15 U63.3
VRESET: U7.8 U12.2 U32.5 U33.5 U33.12
VVID: U12.13 U40.1 U40.4 U52.8
pads on no net: CP1.0 J1.2 J1.3 J1.4 J1.SH U2.2 U2.5 U2.6 U2.8 U2.9 U2.10 U2.11 U6.9 U6.10 U6.13 U15.3 U15.6 U19.15 U20.3 U20.11 U21.5 U23.15 U24.13 U24.14 U25.11 U25.12 U25.13 U25.14 U27.3 U27.11 U29.13 U29.14 U30.11 U30.12 U31.13 U31.14 U31.15 U35.2 U35.6 U37.8 U37.9 U37.10 U37.11 U37.12 U37.13 U40.2 U41.6 U41.8 U42.6 U43.9 U51.10 U51.11 U51.12 U51.13 U52.6 U60.8 U60.9 U60.10 U60.11 U61.9 U61.10 U61.13 U63.5 U63.8 U63.9 U63.10 U63.11 U63.12 U63.13

## Keep-outs
Keep-Out Layer:
  lines w0.254: 11,204.856 7.3,204.856 7.3,15.2 12.9,9.6 30.1,9.6 ; 14.7,204.8 26.2,204.8 ; 29.9,204.8 42.4,204.8 ; 32.8,9.7 60.9,9.7 ; 46.1,204.5 57.3,204.5 ; 61.7,204.3 72.5,204.3 ; 63.6,9.6 91.9,9.6 ; 76.6,204.4 88.4,204.4 ; 92.3,204.4 103.2,204.4 ; 94.5,9.6 122.7,9.6 ; 107.2,204.4 118.9,204.4 ; 123,204.3 136.4,204.3 ; 125.6,9.7 155.9,9.7 ; 140.5,204.3 152.7,204.3 ; 156.4,204.4 168.1,204.4 ; 158.5,9.8 187.1,9.8 ; 172.2,204.4 184,204.4 ; 187.5,204.6 201.3,204.6 ; 189.8,9.7 220.1,9.7 ; 204.9,204.4 216.7,204.4 ; 220.6,204.5 234.2,204.5 ; 223,9.7 253.3,9.7 ; 238,204.4 249.4,204.4 ; 254.1,204.2 265.3,204.2 ; 256.1,9.6 275.9,9.6 ; 269.4,204.4 281.3,204.4 ; 278.7,9.5 309.7,9.5 ; 285.3,204.3 294.1,204.3 ; 320.547,9.022 320.547,9.53

## Silkscreen, mask and mechanical layers (free items; w line width, h text height)
Top Overlay:
  text "PONG E" at 229.2,160.4 h10
  text "Ricardo Ramos" at 242.5,149.7 h3

## Text inside footprints (layer, text, board x,y; h text height)
R6: Top Overlay "CW" at 293.434,32.855 h0.64 r180
R10: Top Overlay "CW" at 293.434,11.392 h0.64 r180